# Altium PCB UDA.PcbDoc
Units mil, origin at the board's own origin, x right, y up, seen from the top; angles counter-clockwise.
Board outline 1968.5 x 1181.1 mil, 2 copper layers (Top Layer, Bottom Layer); 32 components, 29 nets, 123 pads, 37 vias.
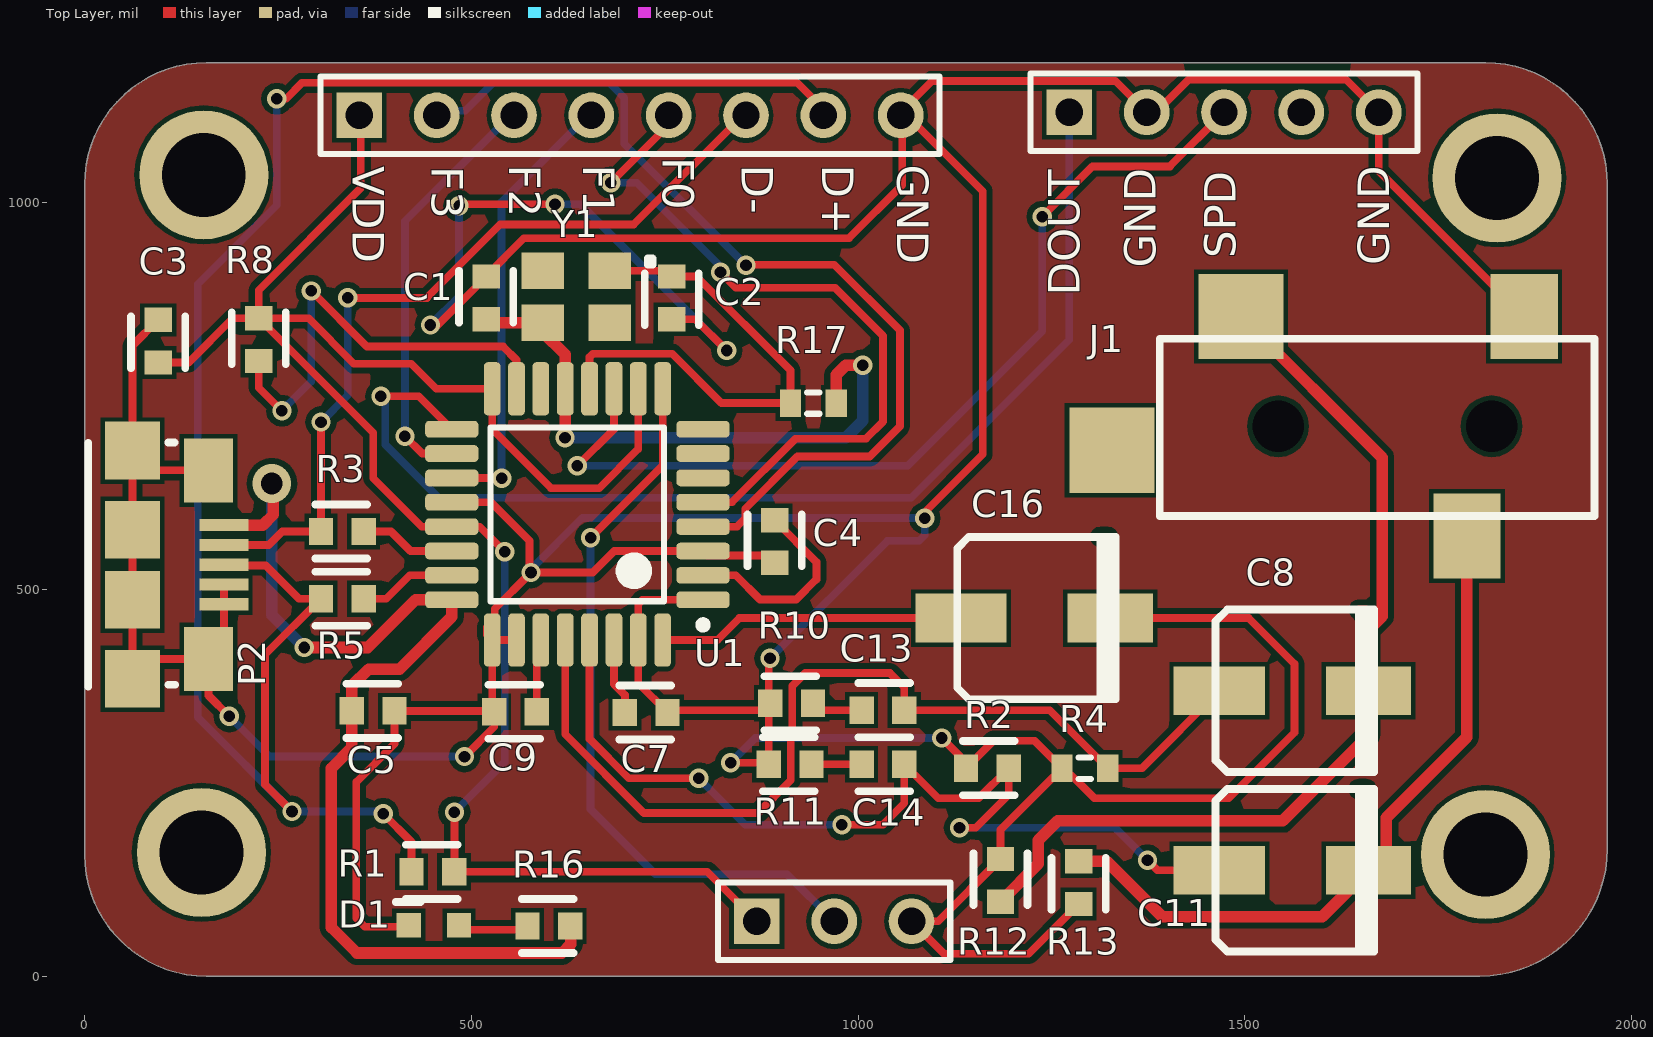
[diagram p0: Top Layer view]
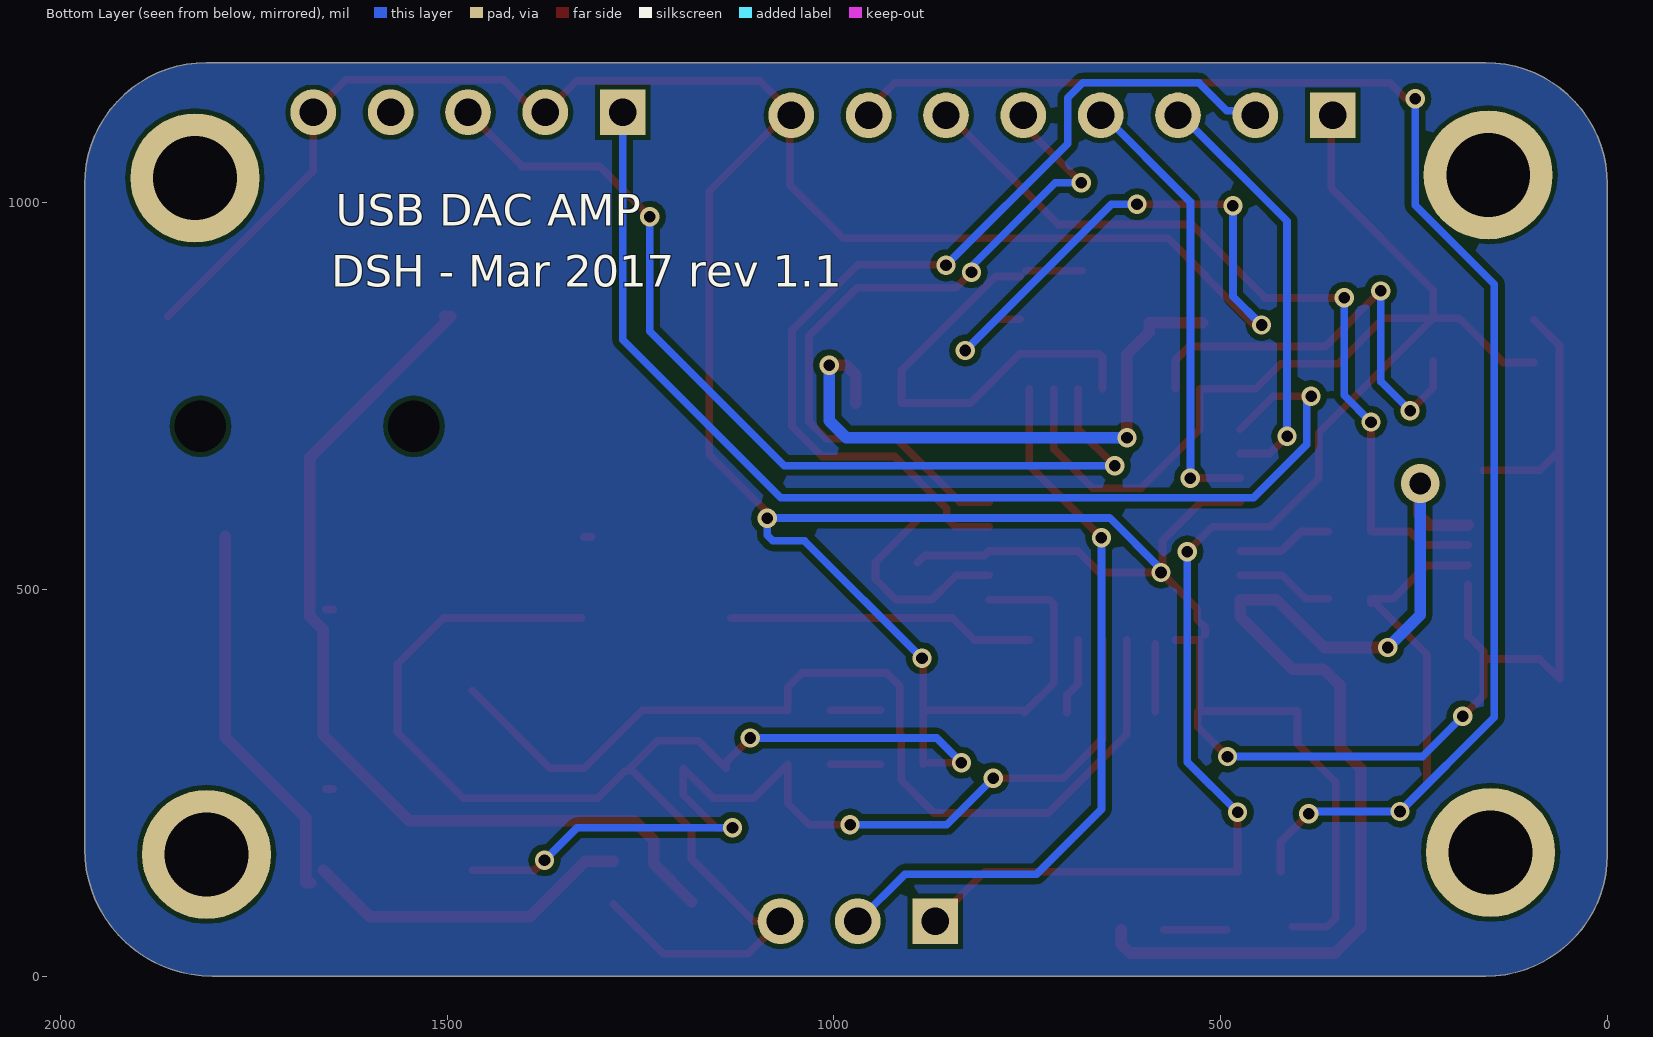
[diagram p1: Bottom Layer view, seen from below]
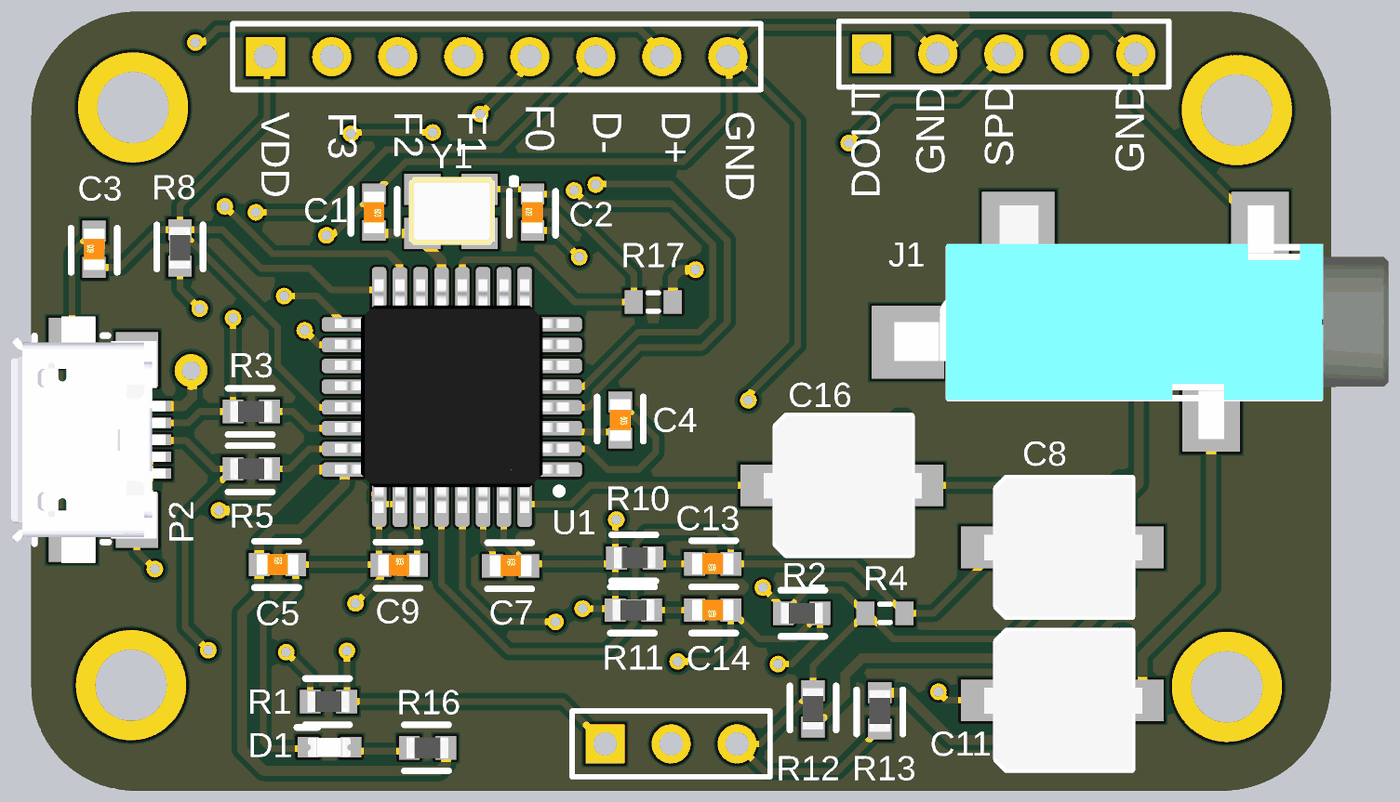
[diagram p2: 3D render of the assembled board from above, using the file's embedded part models]

## Layer stack, top to bottom
Top Solder: solder mask 0.4, Solder Resist, Dk 3.5
Top Layer: signal copper 1.4
Dielectric 1: dielectric 12.6, FR-4, Dk 4.8
Bottom Layer: signal copper 1.4
Bottom Solder: solder mask 0.4, Solder Resist, Dk 3.5

## Board outline
0,157.48 ccw(c157.48,157.48) 157.48,0 1803.5,0 ccw(c1803.5,165) 1968.5,165 1968.5,1023.62 ccw(c1811.02,1023.62) 1811.02,1181.1 157.48,1181.1 ccw(c157.48,1023.62) 0,1023.62

## Design rules (kind name [scope] priority, off if disabled: settings)
Clearance ClearancePads [All vs IsPad] p1: gap=6
Clearance [All] p2: gap=8
HoleSize [All] p1: absolutevalues=TRUE maxlimit=1000 minlimit=15 maxpercent=80.000 minpercent=20.000
PolygonConnect PolygonConnect_2 [InNet('GND') vs IsComponentPad] p1: connectstyle=Relief reliefconductorwidth=10 reliefentries=4 polygonreliefangle="90 Angle" airgapwidth=10
PolygonConnect PolygonConnect_1 [IsComponentPad] p2: connectstyle=Relief reliefconductorwidth=10 reliefentries=4 polygonreliefangle="90 Angle" airgapwidth=10
PolygonConnect [All] p3: connectstyle=Direct reliefconductorwidth=10 reliefentries=4 polygonreliefangle="90 Angle" airgapwidth=10
RoomDefinition UDA [InComponentClass('UDA')] p1: confinementstyle=ConfineIn formatcopy=TRUE lockcomponents=FALSE outline 2008,55 2309,55 2309,973 2008,973
RoutingVias [All] p1: holewidth=15 width=25 viastyle="Through Hole" minholewidth=15 minwidth=25 maxholewidth=15 maxwidth=25
SolderMaskExpansion SolderMaskExpansionVias [IsVia] p1: expansion=-20
SolderMaskExpansion [All] p2: expansion=4
Width WidthPower [InNetClass('Power')] p1: maxlimit=20 minlimit=10 preferedwidth=20
Width [All] p2: maxlimit=100 minlimit=8 preferedwidth=10 minimp=50.000000 maximp=50.000000 favimp=50.000000
29 further rules are at their usual default settings.

## Classes and differential pairs
component class UDA: C1 C2 C3 C4 C5 C7 C8 C9 C11 C13 C14 C16 D1 J1 P2 R1 R2 R3 R4 R5 R8 R10 R11 R12 R13 R16 R17 U1 Y1

## Components (designator, comment, footprint, x,y, rotation, side; value= is the part's Value field where it differs from the comment)
C1 "C0603C220J5GACTU" C0603 519,877 r270 top
C2 "C0603C220J5GACTU" C0603 759,877 r90 top
C3 "TMK107B7105KA-T" C0603 95,821 r90 top
C4 "TMK107B7105KA-T" C0603 892,562 r270 top
C5 "TMK107B7105KA-T" C0603 373,343 r0 top
C7 "TMK107B7105KA-T" C0603 726,341 r0 top
C8 "EEE-1AA101WR" "CAP-5mm dia" 1467,369 r0 top
C9 "TMK107B7105KA-T" C0603 557,342 r0 top
C11 "EEE-1AA101WR" "CAP-5mm dia" 1467,137 r0 top
C13 "C1608X7R1H223K080AA" C0603 1032,344 r180 top
C14 "C1608X7R1H223K080AA" C0603 1032,274 r180 top
C16 "EEE-1HA100WR" "CAP-5mm dia" 1133,463 r0 top
D1 "LTST-C190KGKT" LED_0603 519,101 r180 top
J1 "3.5mm Audio" AUDIO_3.5MM_SMD 1861,853 r180 top
P2 "10118192-0001LF" FCI/10118192-0001LF -50,738 r270 top
P4 "Control" HDR1X5 1273,1117 r0 top
P5 "FSEL" HDR1X3 869,71 r0 top
P6 "I/O" HDR1X8 355,1113 r0 top
R1 "ERJ-3EKF1501V" R0603 450,135 r0 top
R2 "ERJ-3GEYJ332V" R0603 1167,269 r180 top
R3 "ERJ-3GEYJ270V" R0603 333,575 r0 top
R4 "" J1-0603 1293,269 r180 top
R5 "ERJ-3GEYJ270V" R0603 333,488 r0 top
R8 "ERJ-3EKF1501V" R0603 225,823 r270 top
R10 "ERJ-3EKF16R0V" R0603 914,353 r0 top
R11 "ERJ-3EKF16R0V" R0603 912,274 r0 top
R12 "ERJ-3GEYJ332V" R0603 1184,124 r270 top
R13 "ERJ-3GEYJ332V" R0603 1285,121 r90 top
R16 "ERJ-3GEYJ511V" R0603 600,65 r0 top
R17 "" J1-0603 942,741 r0 top
U1 "PCM2707" TQFP-32 637,597 r180 top
Y1 "403C35D12M00000" 4-SMD 679,912 r180 top

## Footprints (in the part's own frame and the unit in brackets; to place one, negate y for a bottom-side part, rotate by r counter-clockwise, add the part's x,y. Pads: shape width x height; smd on the part's side, far side on the other; paste and mask are expansions set on the pad)
4-SMD [mm] "Crystal, 3.2x2.5mm body, TXC 7M series"
  rect 1.4x1.2 smd: 1(0,0) 2(2.2,0) 3(2.2,1.7) 4(0,1.7)
  silkscreen extent -1.4,-0.41 -1.24,-0.2, body extent -0.58,-0.46 2.72,2.14, height 0.8
AUDIO_3.5MM_SMD [mil]
  rect 0x0 hole 67 unplated: 0(42,142) 0(318,142)
  rect 87x110 smd: 1(0,0) 3(74,284)
  rect 110x110 smd: 2(366,0) 4(533,173)
  silkscreen extent -91,29 471,258, body extent -194,-35 554,320, height 201
C0603 [mm] "Chip Capacitor, Body 1.6x0.8mmx0.9mm"
  rect 0.8x0.9 smd: 1(-0.7,0) 2(0.7,0)
  silkscreen extent -0.89,-0.89 0.81,0.89, body extent -0.8,-0.4 0.8,0.4, height 0.3
"CAP-5mm dia" [mm] "SMD Cap 5mm diameter, 5.5mm height"
  rect 3x1.6 smd: 1(0,0)
  rect 2.8x1.6 smd: 2(4.9,0)
  Top Layer lines w0.254: 4.572,2.667 4.826,2.667
  silkscreen extent -0.13,-2.67 5.08,2.67, body extent -0.61,-2.67 5.49,2.67, height 5.52
FCI/10118192-0001LF [mm] "USB Micro B, all surface mount, no holes"
  rect 0.4x1.604 smd: 1(3.932,5.842) 2(4.582,5.842) 3(5.232,5.842) 4(5.882,5.842) 5(6.532,5.842)
  rect 1.9x1.8 smd: 6(1.486,2.84) 6(4.082,2.84) 6(6.382,2.84) 6(8.978,2.84)
  rect 2.103x1.622 smd: 6(2.134,5.334) 6(8.331,5.334)
  silkscreen extent 1.22,1.39 9.23,4.24, body extent 0.48,0.49 9.98,6.43, height 2.74
HDR1X3 [mm] "Connector; Header; 3 Position"
  rect 1.5x1.5 hole 0.9: 1(0,0)
  round 1.5 hole 0.9: 2(2.54,0) 3(5.08,0)
  silkscreen extent -1.27,-1.27 6.35,1.27
HDR1X5 [mm] "Connector; Header; 5 Position"
  rect 1.5x1.5 hole 0.9: 1(0,0)
  round 1.5 hole 0.9: 2(2.54,0) 3(5.08,0) 4(7.62,0) 5(10.16,0)
  silkscreen extent -1.27,-1.27 11.43,1.27
HDR1X8 [mm] "Connector; Header; 8 Position"
  rect 1.5x1.5 hole 0.9: 1(0,0)
  round 1.5 hole 0.9: 2(2.54,0) 3(5.08,0) 4(7.62,0) 5(10.16,0) 6(12.7,0) 7(15.24,0) 8(17.78,0)
  silkscreen extent -1.27,-1.27 19.05,1.27
J1-0603 [mm] "Chip Resistor, Body 1.6x0.8mm, IPC High Density"
  rect 0.7x0.9 smd: 1(-0.75,0) 2(0.75,0)
  silkscreen extent -0.2,-0.35 0.2,0.35, body extent -0.85,-0.48 0.85,0.48, height 0.9
LED_0603 [mm]
  rect 0.8x0.8 smd: 1(0.889,0.889) 2(2.539,0.889)
  silkscreen extent 2.16,0.13 2.97,0.13, body extent 0.9,0.53 2.55,1.26, height 0.68
R0603 [mm] "Chip Resistor, Body 1.6x0.8mmx0.9mm"
  rect 0.8x0.9 smd: 1(-0.7,0) 2(0.7,0)
  silkscreen extent -0.89,-0.89 0.81,0.89, body extent -0.8,-0.4 0.8,0.4, height 0.37
TQFP-32 [mm] "TQFP, 32-Leads, Body 7.00x7.00mm, Pitch 0.80mm, IPC Medium Density"
  rrect50% 1.75x0.55 smd: 1(-4.125,2.8) 2(-4.125,2) 3(-4.125,1.2) 4(-4.125,0.4) 5(-4.125,-0.4) 6(-4.125,-1.2) 7(-4.125,-2) 8(-4.125,-2.8) 17(4.125,-2.8) 18(4.125,-2) 19(4.125,-1.2) 20(4.125,-0.4) 21(4.125,0.4) 22(4.125,1.2) 23(4.125,2) 24(4.125,2.8)
  rrect50% 0.55x1.75 smd: 9(-2.8,-4.125) 10(-2,-4.125) 11(-1.2,-4.125) 12(-0.4,-4.125) 13(0.4,-4.125) 14(1.2,-4.125) 15(2,-4.125) 16(2.8,-4.125) 25(2.8,4.125) 26(2,4.125) 27(1.2,4.125) 28(0.4,4.125) 29(-0.4,4.125) 30(-1.2,4.125) 31(-2,4.125) 32(-2.8,4.125)
  silkscreen extent -4.25,-2.85 2.85,3.75, body extent -4.5,-4.53 4.5,4.47, height 1.47

## Part data
C1 C2: "CAP CER 22PF 50V NP0 0603"
C3 C4 C5 C7 C9: "CAP CER 1UF 25V 10% X7R 0603"
C8 C11: "CAP ALUM 100UF 10V 20% SMD"
C13 C14: "CAP CER 0.022UF 50V 10% X7R 0603"
C16: "CAP ALUM 10UF 50V 20% SMD"
D1: "LED GREEN CLEAR 0603 SMD"
J1: library part SJ-3524-SMT-TR, "CONN AUDIO JACK 3.5MM STEREO SMD"
P2: "CONN USB MICRO B RECPT SMT R/A"
P4: library part "Header 5", "Header, 5-Pin"
P5: library part "Header 3", "Header, 3-Pin"
P6: library part "Header 8", "Header, 8-Pin"
R1 R8: "RES 1.5K OHM 1% 1/10W 0603 SMD"
R2 R12 R13: "RES 3.3K OHM 5% 1/10W 0603 SMD"
R3 R5: "RES 27 OHM 1/10W 5% 0603 SMD"
R4 R17: library part Res3, "Resistor"
R10 R11: "RES 16 OHM 1% 1/10W 0603 SMD"
R16: "RES 510 OHM 1/10W 5% 0603 SMD"
U1: library part PCM2707PJTR, "IC DAC 16BIT STEREO W/USB 32TQFP"
Y1: "CRYSTAL 12MHZ 18PF SMD"

## Free pads (board coordinates)
  round 166.85 hole 108.27: M(151,160) M(154,1036) M(1811.02,157.48) M(1826,1032)

## Via types
v1: diameter 25, hole 15, Top Layer to Bottom Layer, 36 vias
v2: diameter 50, hole 28, Top Layer to Bottom Layer, 1 vias

## Nets (pads, with @x,y where several pads share a name; then routed paths per layer and width w, separated by ;. In a path a pad name is that pad's centre, name@x,y a point inside that pad or via, vN(x,y) a via of type N, cw(c..) or ccw(c..) an arc to the next point about the centre after c; other vN are vias at no path point)
+5V: C5.1 P2.1 R16.2 U1.24 | length 1416.1
  Top Layer w15: P2.1 230.18,583.18 244,597 244,630.43 v2@237.43,637 ; v1(284,425) 366,425 427.76,486.76 U1.24 474.6,464.6 407,397 367,397 345.44,375.44 C5.1 345.44,295.44 319,269 319,63 352,30 617,30 628.56,41.56 R16.2@628.56,60
  Bottom Layer w15: v2(242,637) 242,467 v1(284,425)
D+: P2.3 P6.7 R1.1 R5.1 | length 2424.4
  Top Layer w10: P2.3 181,531 234,531 277,488 R5.1 ; v1(248.43,1134.43) 260.43,1134.43 281,1155 921,1155 P6.7@957,1119 ; v1(268,213) 233,248 233,415.56 R5.1 ; R5.1@305.44,482.5 305.44,484.44 R5.1 ; v1(386,210) 422.44,173.56 R1.1
  Bottom Layer w10: v1(248.43,1134.43) 248.43,996.89 146,894.46 146,335 v1(268,213) 383,213 v1(386,210)
D-: P2.2 P6.6 R3.1 | length 1066.2
  Top Layer w10: P2.2 237.97,557.59 255.38,575 R3.1 v1(305.44,716.44) ; v1(340,877) 442.42,877 537.42,972 710,972 P6.6@857,1119
  Bottom Layer w10: v1(305.44,716.44) 340,751 v1(340,877)
DOUT: P4.1 U1.17 | length 1465.9
  Top Layer w10: v1(383,750) 431.83,750 U1.17
  Bottom Layer w10: v1(383,750) 388.5,744.5 388.5,687.44 457.44,618.5 1068.5,618.5 1273,823 P4.1
FUNC0: P6.5 U1.5 | length 944.8
  Top Layer w10: v1(680,1026) P6.5@757,1103 ; U1.5 836.75,612.75 919,695 1010,695 1032.23,717.23 1032.23,827.77 970,890 842.06,890 v1(822,910.06)
  Bottom Layer w10: v1(680,1026) 713.5,1026 829.44,910.06 v1(822,910.06)
FUNC1: P6.4 U1.19 | length 588.4
  Top Layer w10: U1.19 538.76,644.24 v1(539,644)
  Bottom Layer w10: v1(539,644) 539,1001 P6.4@657,1119
FUNC2: P6.3 U1.18 | length 550.1
  Top Layer w10: v1(414,698) 436.26,675.74 U1.18
  Bottom Layer w10: v1(414,698) 414,976 P6.3@557,1119
FUNC3: P6.2 U1.4 | length 1219.7
  Top Layer w10: U1.4 843.25,581.25 854,592 854,604.54 921.46,672 1015,672 1054,711 1054,835 969,920 856,920 v1(855,919)
  Bottom Layer w10: P6.2@457,1119 492,1119 528,1155 678.31,1155 697.53,1135.79 697.53,1076.47 v1(855,919)
GND: C1.1 C2.1 C3.2 C4.2 C5.2 C7.2 C9.1 C16.2 D1.2 J1.1 P2.4 P2.5 P2.6 P4.2 P4.5 P5.3 P6.8 R2.2 R4.2 R10.1 R11.1 R12.1 R13.1 U1.1 U1.3 U1.20 U1.25 U1.26 U1.31 | length 8714.7
  Top Layer w10: C3.2 61.81,815.37 P2.6@61.81,679.48 ; P2.6@160,654 87.29,654 P2.6@61.81,679.48 ; P2.4 P2.5 180,440 160,420 P2.6@160,410 ; v1(187,336) 160,363 P2.6@160,410 ; D1.2@407.04,64 362,64 351,75 351,251 400.56,300.56 C5.2 C9.1@528.44,343 ; v1(447,842) 456.44,842 C1.1 519,905.35 567.65,954 988,954 1057,1023 P6.8@1057,1119 ; U1.20 525.25,612.75 575,563 v1@575,520 ; v1(484,996) 486,998 v1(608,998) ; v1(491,284) 529.44,322.44 C9.1 ; U1.25@520.05,441.32 520.05,451.05 530,461 530,475 v1@575,520 ; C9.1@526.76,344.68 U1.25 U1.26 ; C7.2 715.74,378.82 U1.31 715.74,481.26 721.24,486.76 U1.1 ; C7.2@756.56,344 R10.1@884.44,344 ; C2.1 789.56,849.44 v1(830,809) ; v1(835,276) 882.44,276 R11.1 R10.1@884.44,344 ; v1(886,411) 884.44,409.44 R10.1@884.44,344 ; C4.2 882.44,544 805.16,544 U1.3 684.76,549.76 657,522 v1(577,522) v1@575,520 ; v1(1086,592) 1086,600 1161,675 1161,1015 P6.8@1057,1119 ; v1(1108,308) 1139.44,276.56 R2.2 1175,304.56 1227.91,304.56 R4.2 ; R13.1 1220.56,29 1111,29 P5.3 1103.44,71 R12.1 1184,189.53 R4.2 ; C16.2 1505,463 1564,404 1564,315 1479,230 1305.5,230 1270.5,265 1267.47,265 R4.2 ; J1.1 1673,1041 P4.5 1631,1159 1427,1159 1385,1117 P4.2 1332.47,1157.53 1095.53,1157.53 P6.8@1057,1119 ; P2.6@61.81,679.48 61.81,577.28 61.81,486.72 61.81,384.52 87.29,410 P2.6@160,410
  Bottom Layer w10: v1(187,336) 239,284 v1(491,284) ; v1(447,842) 484,879 v1(484,996) ; v1(577,522) 577,526.06 643.44,592.5 1085.5,592.5 v1(1086,592) 1086,570 1079,563 1038,563 v1(886,411) ; v1(608,998) 641,998 v1(830,809) ; v1(835,276) 867,308 v1(1108,308)
NetC1_2: C1.2 R17.2 U1.13 Y1.3 | length 772.4
  Top Layer w15: C1.2@523.37,845.07 Y1.3 592.39,832.61 621.25,803.75 U1.13 621.25,696.25 v1(621,696) ; R17.2 971.53,777.53 984,790 v1(1006,790)
  Bottom Layer w15: v1(621,696) 984,696 1006,718 v1(1006,790)
NetC2_2: C2.2 R17.1 U1.12 Y1.1 | length 647.7
  Top Layer w10: U1.12 652.75,800.45 657.15,804.85 759.45,804.85 823.3,741 R17.1 912.47,783.53 791.44,904.56 C2.2 ; Y1.1 C2.2@751.56,912
NetC4_1: C4.1 U1.2 | length 269.2
  Top Layer w10: U1.2 841.74,518.26 873,487 920,487 946,513 946,535.56 C4.1
NetC7_1: C7.1 U1.30 | length 99.5
  Top Layer w10: U1.30 684.24,377.76 698.44,363.56 C7.1
NetC8_2: C8.2 J1.2 R12.2 | length 1215
  Top Layer w15: R12.2 1233,145.44 1233,176 1258,201 1549,201 1659.91,311.91 C8.2 1659.91,447.92 1677.5,465.51 1677.5,670.5 J1.2 J1.2@1503,853
NetC9_2: C9.2 U1.27 | length 87.4
  Top Layer w10: C9.2 U1.27@584.56,429.4
NetC11_2: C11.2 J1.3 R13.2 | length 927.5
  Top Layer w15: R13.2 1321.44,148.56 1393,77 1599.91,77 C11.2 ; C11.2@1676.18,120.74 1682.91,120.74 1682.91,204.91 1787,309 J1.3
NetC13_2: C13.2 R10.2 | length 64.9
  Top Layer w10: R10.2@939.56,344 C13.2
NetC14_2: C14.2 R11.2 | length 64.9
  Top Layer w10: R11.2 C14.2
NetC16_1: C16.1 U1.32 | length 397.5
  Top Layer w10: U1.32 818,434.6 846.4,463 C16.1
NetD1_1: D1.1 R16.1 | length 81.4
  Top Layer w10: D1.1@492,60 R16.1@573.44,60
NetP5_2: P5.2 U1.9 | length 957.1
  Top Layer w10: v1(654,567) 747.24,660.24 U1.9
  Bottom Layer w10: v1(654,567) 654,216 738,132 908,132 P5.2
NetR3_2: R3.2 U1.22 | length 124.5
  Top Layer w10: R3.2 396,575 421.24,549.76 U1.22
NetR5_2: R5.2 U1.23 | length 126.6
  Top Layer w10: R5.2 390,488 420.26,518.26 U1.23
NetR8_2: R8.2 U1.15 | length 587.2
  Top Layer w10: R8.2 225,761 v1(255,731) ; v1(293,886) 365,814 541,814 558.26,796.74 U1.15
  Bottom Layer w10: v1(255,731) 293,769 v1(293,886)
SHDN: P4.4
SSPND: P4.3 U1.11 | length 1231
  Top Layer w10: v1(637,660) 684.24,707.24 U1.11 ; v1(1238,982) 1303,1047 1403,1047 P4.3
  Bottom Layer w10: v1(637,660) 1064,660 1238,834 v1(1238,982)
VDD: C3.1 P5.1 P6.1 R1.2 R8.1 U1.10 U1.16 U1.21 | length 2523.3
  Top Layer w10: C3.1 134.44,793.44 191.56,850.56 R8.1 ; P6.1@357,1119 357,1019 225,887 R8.1 ; R1.2 805,135 P5.1 ; R1.2@478,135.44 v1(478,212) ; v1(543,549) 510.75,581.25 U1.21 435.75,581.25 373,644 373,702.56 R8.1 ; U1.10 715.74,681.74 665,631 603,631 526.76,707.24 U1.16 454.6,759.4 422,792 348,792 289.44,850.56 R8.1
  Bottom Layer w10: v1(478,212) 543,277 v1(543,549)
VOUT_L: C8.1 C13.1 R4.1 U1.28 | length 1264.6
  Top Layer w10: U1.28 621.25,312.75 723,211 870.46,211 912.81,253.35 912.81,311.81 914.81,313.81 914.81,375.27 931.54,392 1041,392 1059.56,373.44 C13.1 1247.53,344 R4.1 1367,269 C8.1
VOUT_R: C11.1 C14.1 R2.1 U1.29 | length 1286.2
  Top Layer w10: U1.29 652.75,306.71 703.46,256 v1(794,256) ; v1(979,196) 1032,196 1059.56,223.56 C14.1 1103.56,230 1155.56,230 R2.1 1194.56,234.56 1152,192 v1(1131,192) ; v1(1374,150) 1387,137 C11.1
  Bottom Layer w10: v1(794,256) 854,196 v1(979,196) ; v1(1131,192) 1332,192 v1(1374,150)
pads on no net: J1.0 J1.4 U1.6 U1.7 U1.8 U1.14 Y1.2 Y1.4

## Polygon pours and split planes (outlines as drawn)
no net on Top Layer "Top Layer-No Net" (solid, pour order 6): 0,157.48 ccw(c157.48,157.48) 157.48,0 1803.5,0 ccw(c1803.5,165) 1968.5,165 1968.5,1023.62 ccw(c1811.02,1023.62) 1811.02,1181.1 157.48,1181.1 ccw(c157.48,1023.62) 0,1023.62
no net on Bottom Layer "Bottom Layer-No Net1" (solid, pour order 8): 0,157.48 ccw(c157.48,157.48) 157.48,0 1803.5,0 ccw(c1803.5,165) 1968.5,165 1968.5,1023.62 ccw(c1811.02,1023.62) 1811.02,1181.1 157.48,1181.1 ccw(c157.48,1023.62) 0,1023.62

## Silkscreen, mask and mechanical layers (free items; w line width, h text height)
Top Overlay:
  text "F0" at 734,1059 h70 r270
  text "F2" at 535,1049 h70 r270
  text "F1" at 631,1049 h70 r270
  text "D-" at 836,1049 h70 r270
  text "D+" at 940,1049 h70 r270
  text "GND" at 1037,1049 h70 r270
  text "VDD" at 333,1047 h70 r270
  text "F3" at 435,1047 h70 r270
  text "SPD" at 1502,928 h70 r90
  text "GND" at 1700,919 h70 r90
  text "GND" at 1398,916 h70 r90
  text "DOUT" at 1300,880 h70 r90
Bottom Overlay:
  text "USB DAC AMP" at 1644,957 h70
  text "DSH - Mar 2017 rev 1.1" at 1650,878 h70
Mechanical 5:
  the board outline again, w10